# Altium PCB PCB1.PcbDoc
Units mil, origin at the board's own origin, x right, y up, seen from the top; angles counter-clockwise.
Board outline 3450 x 2970 mil, 2 copper layers (Top Layer, Bottom Layer); 124 components, 93 nets, 362 pads, 0 vias.
Unrouted connection lines stored in the file: 236.
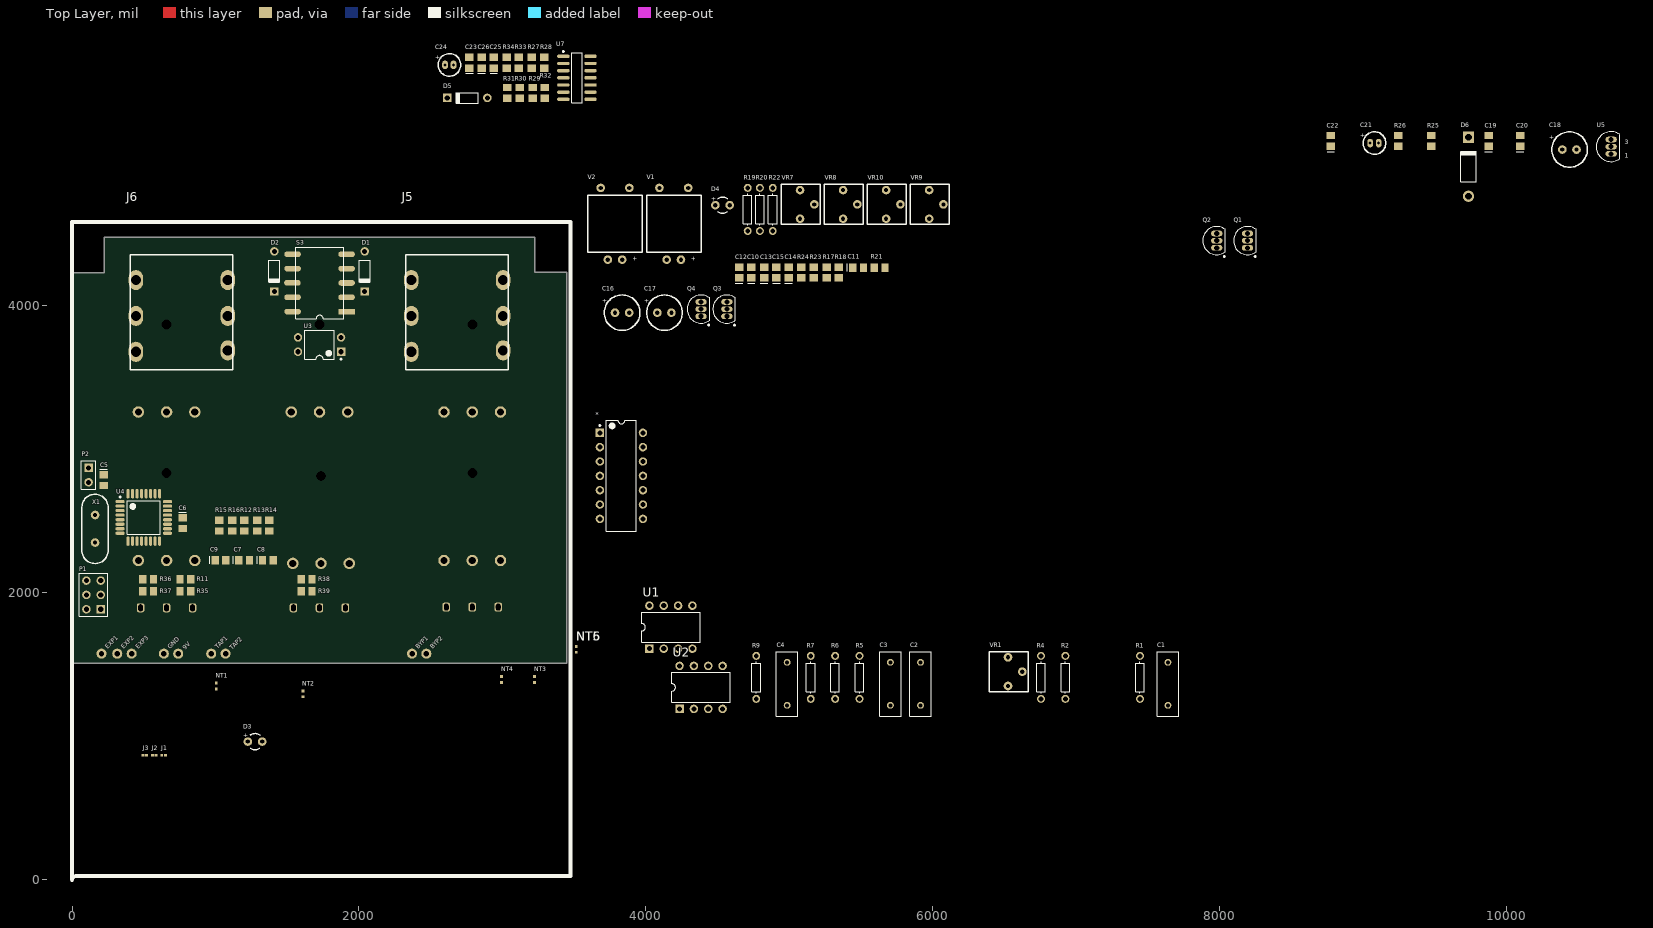
[diagram p0: Top Layer view]
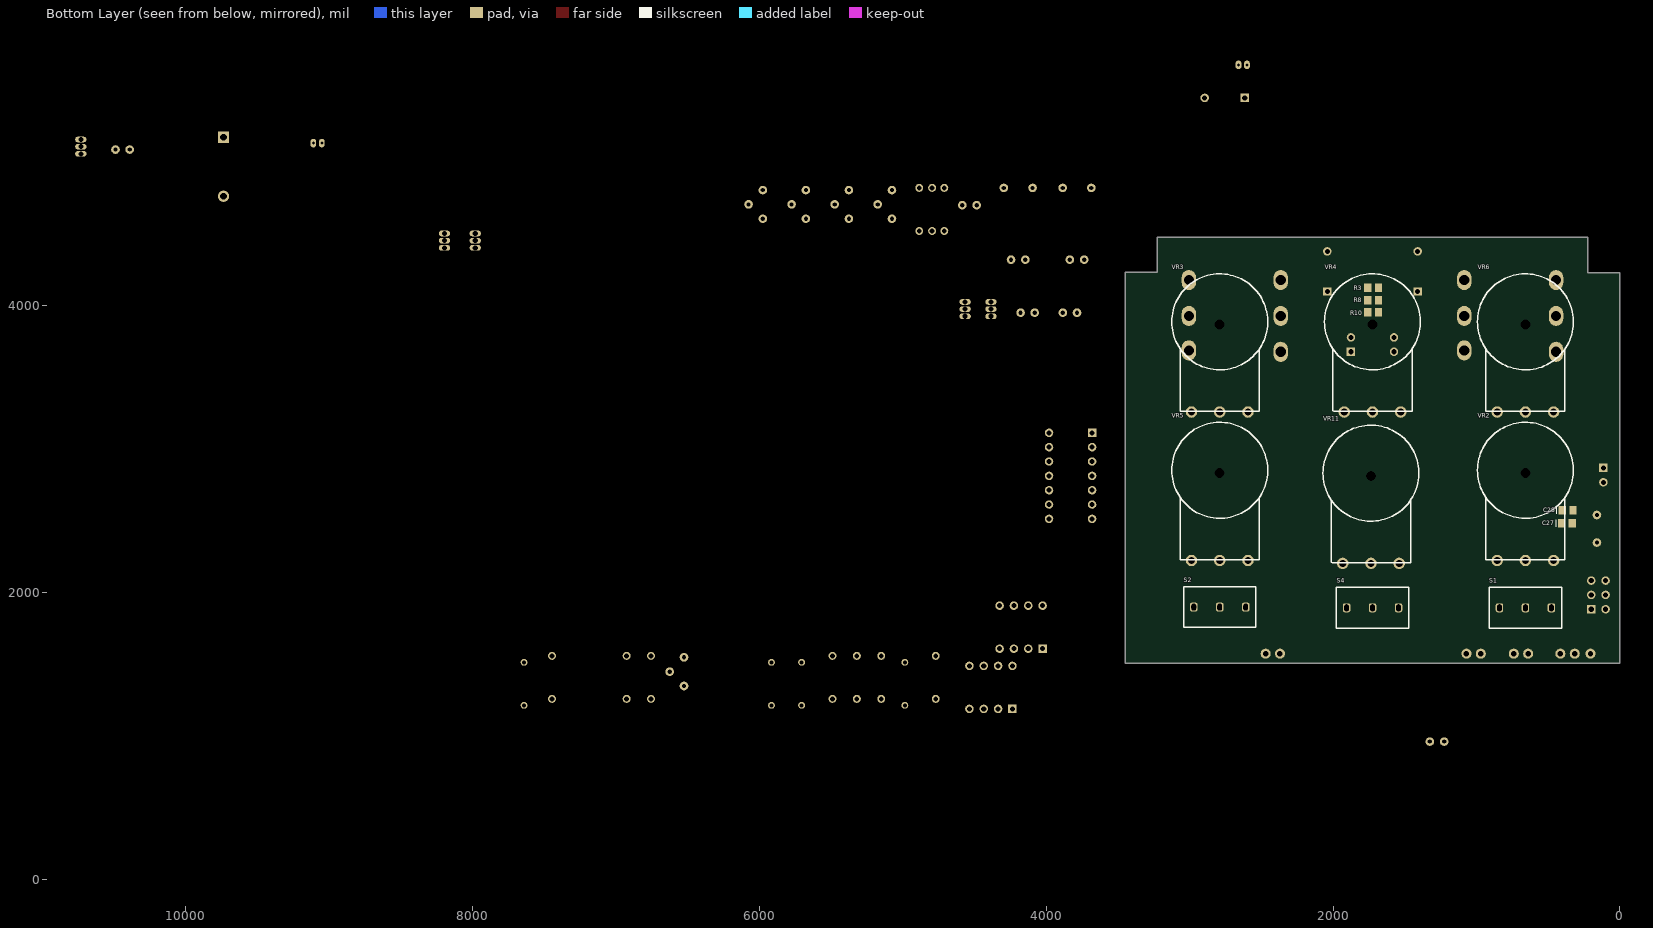
[diagram p1: Bottom Layer view, seen from below]

## Layer stack, top to bottom
Top Solder: solder mask 0.4, Solder Resist, Dk 3.5
Top Layer: signal copper 1.4
Dielectric 1: dielectric 12.6, FR-4, Dk 4.8
Bottom Layer: signal copper 1.4
Bottom Solder: solder mask 0.4, Solder Resist, Dk 3.5

## Board outline
3225,4235 3450,4235 3450,1510 0,1510 0,4230 225,4230 225,4480 3225,4480

## Design rules (kind name [scope] priority, off if disabled: settings)
Clearance [All] p1: gap=10 ignorepadtopadclearanceinfootprint=FALSE except(0: Arc-Hole Track-Hole SMDPad-Hole THPad-Hole Via-Hole Fill-Hole Poly-Hole Region-Hole Text-Hole)
PolygonConnect [All] p1: connectstyle=Relief reliefconductorwidth=10 reliefentries=4 polygonreliefangle="90 Angle" airgapwidth=10
RoomDefinition U_Envelope [InComponentClass('U_Envelope')] p1: confinementstyle=ConfineIn formatcopy=TRUE lockcomponents=FALSE outline 2475.24,5345 3715.24,5345 3715.24,5850 2475.24,5850
RoomDefinition U_Analog [InComponentClass('U_Analog')] p2: confinementstyle=ConfineIn formatcopy=TRUE lockcomponents=FALSE outline 3800,1130 7725,1130 7725,2080 3800,2080
RoomDefinition U_TAPLFO [InComponentClass('U_TAPLFO')] p3: confinementstyle=ConfineIn formatcopy=TRUE lockcomponents=FALSE outline 3580.32,3780 6170,3780 6170,4873.96 3580.32,4873.96
RoomDefinition U_Power [InComponentClass('U_Power')] p4: confinementstyle=ConfineIn formatcopy=TRUE lockcomponents=FALSE outline 6060,0 8060,0 8060,1000 6060,1000
RoomDefinition U_Bypass [InComponentClass('U_Bypass')] p5: confinementstyle=ConfineIn formatcopy=TRUE lockcomponents=FALSE outline 1355,3610 2095,3610 2095,4470 1355,4470
RoutingVias [All] p1: holewidth=28 width=50 viastyle="Through Hole" minholewidth=28 minwidth=50 maxholewidth=28 maxwidth=50
SolderMaskExpansion [All] p1: expansion=4
Width [All] p1: maxlimit=10 minlimit=10 preferedwidth=10
30 further rules are at their usual default settings.

## Classes and differential pairs
component class U_Envelope: C23 C24 C25 C26 D5 R27 R28 R29 R30 R31 R32 R33 R34 U7 VR11
component class U_TAPLFO: * C10 C11 C12 C13 C14 C15 C16 C17 D4 Q3 Q4 R17 R18 R19 R20 R21 R22 R23 R24 V1 V2 VR7 VR8 VR9 VR10
component class U_Power: C18 C19 C20 C21 C22 D6 R25 R26 U5
component class U_MCU: C5 C6 C7 C8 C9 C27 C28 D3 J1 J2 J3 P1 P2 R12 R13 R14 R15 R16 U4 X1
component class U_CONTROLS: 9V BYP1 BYP2 EXP1 EXP2 EXP3 GND J5 J6 NT1 NT2 NT3 NT4 NT5 NT6 R11 R35 R36 R37 R38 R39 S1 S4 TAP1 TAP2 VR2 VR4 VR5 VR6 VR?
component class U_Bypass: D1 D2 Q1 Q2 R3 R8 R10 S3 U3
component class U_Analog: C1 C2 C3 C4 R1 R2 R4 R5 R6 R7 R9 S2 U1 U2 VR1 VR3

## Components (designator, comment, footprint, x,y, rotation, side; value= is the part's Value field where it differs from the comment)
9V "Wire Pad" "Wire Pad" 740,1575 r0 top
* "TAPLFO 3C" DIP-14 3830,2815 r0 top
BYP1 "Wire Pad" "Wire Pad" 2370,1575 r0 top
BYP2 "Wire Pad" "Wire Pad" 2470,1575 r0 top
C1 "Cap" RAD-0.3 7640,1365 r90 top value=10n
C2 "Cap" RAD-0.3 5915,1365 r90 top value=100n
C3 "Cap" RAD-0.3 5705,1365 r90 top value=100n
C4 "Cap" RAD-0.3 4985,1365 r90 top value=4.7n
C5 "C0805" 0805 220,2785 r270 top value=1uF
C6 "C0805" 0805 770,2485 r270 top value=100n
C7 "C0805" 0805 1200,2227.4 r0 top value=100n
C8 "C0805" 0805 1365,2227.4 r0 top value=100n
C9 "C0805" 0805 1035,2227.4 r0 top value=100n
C10 "C0805" 0805 4735,4232.4 r90 top value=100n
C11 "C0805" 0805 5480,4267.4 r0 top value=100n
C12 "C0805" 0805 4650,4232.4 r90 top value=100n
C13 "C0805" 0805 4825,4232.4 r90 top value=100n
C14 "C0805" 0805 4995,4232.4 r90 top value=100n
C15 "C0805" 0805 4910,4232.4 r90 top value=100n
C16 "CAP ELEC 100uF" "100uF CAP 2.5mm" 3785,3952.4 r0 top value=100uF
C17 "CAP ELEC 100uF" "100uF CAP 2.5mm" 4080,3952.4 r0 top value=100uF
C18 "CAP ELEC 100uF" "100uF CAP 2.5mm" 10390,5090 r0 top value=100uF
C19 "C0805" 0805 9875,5150 r90 top value=330n
C20 "C0805" 0805 10095,5150 r90 top value=100n
C21 "CAP ELEC 10uF" "CAP 10uF" 9050,5135 r0 top value=10uF
C22 "C0805" 0805 8775,5150 r90 top value=100n
C23 "C0805" 0805 2770.24,5695 r90 top value=100n
C24 "CAP ELEC 10uF" "CAP 10uF" 2600.24,5680 r0 top value=10uF
C25 "C0805" 0805 2940.24,5695 r90 top value=470n
C26 "C0805" 0805 2855.24,5695 r90 top value=470n
C27 "C0805" 0805 370,2485 r180 bottom value=18p
C28 "C0805" 0805 365,2575 r180 bottom value=18p
D1 "Diode 1N4148" DO-35 2040,4240 r270 top
D2 "Diode 1N4148" DO-35 1410,4240 r270 top
D3 "LED5MM" LED5MM 1275,962.4 r0 top
D4 "LED5MM" LED5MM 4535,4702.4 r0 top
D5 "1n914" DO-35 2755.24,5450 r180 top
D6 "Diode 1N4001" DO-41 9735,4970 r90 top
EXP1 "Wire Pad" "Wire Pad" 205,1575 r90 top
EXP2 "Wire Pad" "Wire Pad" 315,1575 r90 top
EXP3 "Wire Pad" "Wire Pad" 415,1575 r90 top
GND "Wire Pad" "Wire Pad" 640,1575 r0 top
J1 "Jumper" Jumper 635,867.4 r0 top
J2 "Jumper" Jumper 570,867.4 r0 top
J3 "Jumper" Jumper 505,867.4 r0 top
J5 "Stereo Jack" CliffJack 2365,4355 r0 top locked
J6 "Stereo Jack" CliffJack 445,4355 r0 top locked
NT1 "Net Tie" "Net Tie" 1005,1350 r90 top net-tie
NT2 "Net Tie" "Net Tie" 1610,1295 r90 top net-tie
NT3 "Net Tie" "Net Tie" 3225,1395 r90 top net-tie
NT4 "Net Tie" "Net Tie" 2995,1395 r90 top net-tie
NT5 "Net Tie" "Net Tie" 3515,1605 r90 top net-tie
NT6 "Net Tie" "Net Tie" 3515,1605 r90 top net-tie
P1 "Header 3X2" HDR2X3 200,1885 r90 top
P2 "Header 2" HDR1X2 115,2870 r270 top
Q1 "2N3904" TO-92A 8195,4454.76 r0 top
Q2 "2N3904" TO-92A 7980,4454.76 r0 top
Q3 "2N3906" TO-92A 4565,3977.4 r0 top
Q4 "2N3904" TO-92A 4385,3977.4 r0 top
R1 "Res1" AXIAL-0.3 7445,1410 r90 top value=10k
R2 "Res1" AXIAL-0.3 6925,1410 r90 top value=10k
R3 "1k" ERA-0805 1720,4125 r180 bottom
R4 "Res1" AXIAL-0.3 6755,1410 r90 top value=2.2k
R5 "Res1" AXIAL-0.3 5490,1410 r90 top value=10k
R6 "Res1" AXIAL-0.3 5320,1410 r90 top value=1M
R7 "Res1" AXIAL-0.3 5150,1410 r90 top value=1M
R8 "1k" ERA-0805 1720,4040 r180 bottom
R9 "Res1" AXIAL-0.3 4770,1410 r90 top value=10k
R10 "1k" ERA-0805 1720,3955 r180 bottom
R11 "22k" ERA-0805 790,2095 r180 top
R12 "3.3k" ERA-0805 1200,2467.4 r90 top
R13 "47k" ERA-0805 1290,2467.4 r90 top
R14 "47k" ERA-0805 1375,2467.4 r90 top
R15 "47k" ERA-0805 1025,2467.4 r90 top
R16 "10k" ERA-0805 1115,2467.4 r90 top
R17 "47k" ERA-0805 5260,4232.4 r90 top
R18 "47k" ERA-0805 5345,4232.4 r90 top
R19 "Res1" AXIAL-0.3 4710,4672.4 r90 top value=1K
R20 "Res1" AXIAL-0.3 4795,4672.4 r90 top value=220
R21 "47k" ERA-0805 5630,4267.4 r0 top
R22 "Res1" AXIAL-0.3 4885,4672.4 r90 top value=50
R23 "47k" ERA-0805 5170,4232.4 r90 top
R24 "47k" ERA-0805 5085,4232.4 r90 top
R25 "10k" ERA-0805 9475,5150 r90 top
R26 "10k" ERA-0805 9245,5150 r90 top
R27 "4.7k" ERA-0805 3205.24,5695 r90 top
R28 "22k" ERA-0805 3290.24,5695 r90 top
R29 "100k" ERA-0805 3210.24,5485 r90 top
R30 "33k" ERA-0805 3120.24,5485 r90 top
R31 "47k" ERA-0805 3035.24,5485 r90 top
R32 "1k" ERA-0805 3295.24,5485 r90 top
R33 "4.7k" ERA-0805 3115.24,5695 r90 top
R34 "4.7k" ERA-0805 3030.24,5695 r90 top
R35 "22k" ERA-0805 790,2010 r180 top
R36 "15k" ERA-0805 530,2095 r0 top
R37 "22k" ERA-0805 530,2010 r0 top
R38 "22k" ERA-0805 1635,2095 r180 top
R39 "22k" ERA-0805 1635,2010 r180 top
S1 "SPDT Toggle" "SPDT Toggle" 839.88,1895 r180 bottom
S2 "SPDT Toggle" "SPDT Toggle" 2971.1,1900 r180 bottom
S3 "Relay DPDT Dual Coil" "EB2 Relay" 1913.98,3960 r180 top
S4 "SPDT Toggle" "SPDT Toggle" 1905.49,1895 r180 bottom
TAP1 "Wire Pad" "Wire Pad" 970,1575 r0 top
TAP2 "Wire Pad" "Wire Pad" 1070,1575 r0 top
U1 "LM833N" 626-05 4175,1760 r0 top
U2 "LM833N" 626-05 4385,1340 r0 top
U3 "Optoisolator1" DIP-4 1725,3730 r180 top
U4 "ATmega328P-AU" 32A_N 500,2525 r0 top
U5 "MC78L05ACPRA" 29-04 10730,5110 r0 top
U7 "MC33204DR2G" 751A-03_N 3519.72,5590 r0 top
V1 "Vactrol" VACTROL 4195,4572.4 r90 top
V2 "Vactrol" VACTROL 3785,4572.4 r90 top
VR1 "Gain Trim" "Trimpot - Bourns" 6575,1450 r0 top value=25k
VR2 "Pot-16mm" Pot-16mm 658.78,2224.76 r180 bottom locked value=B10k
VR3 "Pot-16mm" Pot-16mm 2790,3259.76 r180 bottom locked value=A1M
VR4 "Pot-16mm" Pot-16mm 1725,3259.76 r180 bottom locked value=B10k
VR5 "Pot-16mm" Pot-16mm 2790,2224.76 r180 bottom locked value=B10k
VR6 "Pot-16mm" Pot-16mm 658.78,3259.76 r180 bottom locked value=B10k
VR7 "Trim" "Trimpot - Bourns" 5125,4707.4 r0 top value=10k
VR8 "Trim" "Trimpot - Bourns" 5425,4707.4 r0 top value=1k
VR9 "Trim" "Trimpot - Bourns" 6025,4707.4 r0 top value=1k
VR10 "Trim" "Trimpot - Bourns" 5725,4707.4 r0 top value=10k
VR11 "Pot-16mm" Pot-16mm 1735.51,2204.76 r180 bottom locked value=B100k
X1 "16M" "XTAL PTH" 160,2350 r90 top

## Footprints (in the part's own frame and the unit in brackets; to place one, negate y for a bottom-side part, rotate by r counter-clockwise, add the part's x,y. Pads: shape width x height; smd on the part's side, far side on the other; paste and mask are expansions set on the pad)
29-04 [mm] "TO, Flat Index; 3 In-Line, Axial Leads; Body Dia. 4.8mm; Leads 0.48 x 0.51 mm (max)"
  oval 2x1 hole 0.9: 1(0,-1.27) 2(0,0) 3(0,1.27)
  silkscreen extent -2.65,-2.65 1.55,2.65
32A_N [mm] "Thin QFP, 32-Leads, Body 7x7mm, Pitch 0.8mm, IPC Medium Density"
  oval 1.65x0.55 smd: 1(-4.2,2.8) 2(-4.2,2) 3(-4.2,1.2) 4(-4.2,0.4) 5(-4.2,-0.4) 6(-4.2,-1.2) 7(-4.2,-2) 8(-4.2,-2.8) 17(4.2,-2.8) 18(4.2,-2) 19(4.2,-1.2) 20(4.2,-0.4) 21(4.2,0.4) 22(4.2,1.2) 23(4.2,2) 24(4.2,2.8)
  oval 0.55x1.65 smd: 9(-2.8,-4.2) 10(-2,-4.2) 11(-1.2,-4.2) 12(-0.4,-4.2) 13(0.4,-4.2) 14(1.2,-4.2) 15(2,-4.2) 16(2.8,-4.2) 25(2.8,4.2) 26(2,4.2) 27(1.2,4.2) 28(0.4,4.2) 29(-0.4,4.2) 30(-1.2,4.2) 31(-2,4.2) 32(-2.8,4.2)
  silkscreen extent -4.32,-2.95 2.95,3.75, body extent -3.5,-3.5 3.5,3.5, height 1.2
"100uF CAP 2.5mm" [mil] "100uF Nichicon electrolytic, 2.5mm lead spacing"
  round 60 hole 30: 1(0,0) 2(98.43,0)
  silkscreen extent -74,-124 174,124
626-05 [mm] "DIP; 8 Leads; Row Spacing 7.62 mm; Pitch 2.54 mm"
  rect 1.5x1.5 hole 0.9: 1(-3.81,-3.81)
  round 1.5 hole 0.9: 2(-1.27,-3.81) 3(1.27,-3.81) 4(3.81,-3.81) 5(3.81,3.81) 6(1.27,3.81) 7(-1.27,3.81) 8(-3.81,3.81)
  silkscreen extent -5.15,-2.65 5.15,2.65
751A-03_N [mm] "SOIC, 14-Leads, Body 8.7x3.9mm, Pitch 1.27mm, IPC Medium Density"
  oval 2.2x0.6 smd: 1(-2.4,3.81) 2(-2.4,2.54) 3(-2.4,1.27) 4(-2.4,0) 5(-2.4,-1.27) 6(-2.4,-2.54) 7(-2.4,-3.81) 8(2.4,-3.81) 9(2.4,-2.54) 10(2.4,-1.27) 11(2.4,0) 12(2.4,1.27) 13(2.4,2.54) 14(2.4,3.81)
  silkscreen extent -2.52,-4.4 0.9,4.78, body extent -2,-4.38 2,4.38, height 1.75
0805 [mm] "Chip Capacitor; Body 2.0 x 1.2 mm (LxW typ)"
  rect 1.3x1.5 smd: 1(-0.95,0) 2(0.95,0)
  silkscreen extent -1.9,-0.65 -1.9,0.65
AXIAL-0.3 [mm] "Axial Device, Thru-Hole; 2 Leads; 0.3 in Pin Spacing"
  round 1.4 hole 0.85: 1(-3.81,0) 2(3.81,0)
  silkscreen extent -2.77,-0.76 2.77,0.76
"CAP 10uF" [mil]
  oval 40x60 hole 21.65: 1(0,0) 2(59.06,0)
  silkscreen extent -49,-79 109,79
CliffJack [mil]
  oval 100x140 hole 70.87: R(640,-425) RS(0,-425) S(640,-175) SS(0,-175) T(640,-665) TS(0,-675)
  silkscreen extent -40,-800 675,0, body extent -77,-1003 710,343, height 1850
DIP-4 [mm] "DIP; 4 Leads; Row Spacing 7.62 mm; Pitch 2.54 mm"
  rect 1.5x1.5 hole 0.9: 1(-3.81,1.27)
  round 1.5 hole 0.9: 2(-3.81,-1.27) 3(3.81,-1.27) 4(3.81,1.27)
  silkscreen extent -3.94,-2.55 2.65,2.69, body extent -3.15,-2.5 3.15,2.5, height 5.6
DIP-14 [mm]
  rect 1.5x1.5 hole 0.9: 1(-3.81,7.62)
  round 1.5 hole 0.9: 2(-3.81,5.08) 3(-3.81,2.54) 4(-3.81,0) 5(-3.81,-2.54) 6(-3.81,-5.08) 7(-3.81,-7.62) 8(3.81,-7.62) 9(3.81,-5.08) 10(3.81,-2.54) 11(3.81,0) 12(3.81,2.54) 13(3.81,5.08) 14(3.81,7.62)
  silkscreen extent -3.93,-9.85 2.65,9.85, body extent -3.55,-9.85 3.55,9.85, height 5.34
DO-35 [mm] "Diode, Axial; Body 3.8 x 1.9 mm (LxDia. max), Lead Dia. 0.53 mm (max)"
  round 1.5 hole 0.9: 1(-3.55,0)
  rect 1.5x1.5 hole 0.9: 2(3.55,0)
  silkscreen extent -1.95,-0.95 2.05,0.95
DO-41 [mm] "Diode, Axial; Body 5.2 x 2.7 mm (LxDia. max), Lead Dia. 0.86 mm (max)"
  round 2 hole 1.2: 1(-5.23,0)
  rect 2x2 hole 1.2: 2(5.23,0)
  silkscreen extent -2.65,-1.4 2.75,1.4
"EB2 Relay" [mm]
  rect 2.94x1 smd: 1(0,0)
  oval 2.94x1 smd: 2(0,-2.54) 3(0,-5.08) 4(0,-7.62) 5(0,-10.16) 6(9.56,-10.16) 7(9.56,-7.62) 8(9.6,-5.1) 9(9.56,-2.54) 10(9.56,0)
  silkscreen extent 0.5,-11.43 9,1.27, body extent 0.5,-11.4 9,1.2, height 7.5
ERA-0805 [mm] "Chip Resistor; Body 2 x 1.3 mm (LxW typ)"
  rect 1.3x1.5 smd: 1(-0.95,0) 2(0.95,0)
HDR1X2 [mm] "Connector; Header; 2 Position"
  rect 1.5x1.5 hole 0.9: 1(0,0)
  round 1.5 hole 0.9: 2(2.54,0)
  silkscreen extent -1.27,-1.27 3.81,1.27
HDR2X3 [mm] "Connector; Header; 3x2 Position"
  rect 1.5x1.5 hole 0.9: 1(0,0)
  round 1.5 hole 0.9: 2(0,2.54) 3(2.54,0) 4(2.54,2.54) 5(5.08,0) 6(5.08,2.54)
  silkscreen extent -1.27,-1.27 6.35,3.81
Jumper [mil]
  rect 20x20 smd paste+0: 1(-10,0)
  rect 20x20 smd: 2(15,0)
LED5MM [mil]
  round 60 hole 30: 0(-50,0) 1(50,0)
  silkscreen extent -34,-56 35,57
"Net Tie" [mil]
  rect 20x20 smd mask+4: 0(-20,0) 1(20,0)
Pot-16mm [mil]
  round 80 hole 50: 1(196.85,0) 2(0,0) 2(0,0) 3(-196.85,0)
  round 0 hole 70: 6(0,610.24)
  silkscreen extent -335,4 334,964, body extent -335,-4 335,945, height 900
RAD-0.3 [mm] "Radial Cap, Thru-Hole; 2 Leads; 0.3 in Pin Spacing"
  round 1.2 hole 0.7: 1(-3.81,0) 2(3.81,0)
  silkscreen extent -5.71,-1.91 5.71,1.91
"SPDT Toggle" [mil]
  rrect50% 52x62 hole 31.5 slot 47.24 at 90 deg: 1(362.2,0) 2(181.1,0) 3(0,0)
  silkscreen extent -71,-142 433,142, body extent -73,-138 427,146, height 992
TO-92A [mm] "TO, Flat Index; 3 In-Line, Axial Leads; Body Dia. 4.5mm; Leads 0.51 x 0.48 mm (max)"
  oval 2x1 hole 0.9: 1(0,-1.27) 2(0,0) 3(0,1.27)
  silkscreen extent -2.48,-2.95 1.5,2.48, body extent -2.48,-2.5 1.5,2.5, height 6.86
"Trimpot - Bourns" [mil]
  round 60 hole 30: 1(-50,-100) 2(50,0) 3(-50,100)
  silkscreen extent -180,-140 90,140
VACTROL [mil]
  round 60 hole 30: 0(-250,-50) 1(-250,50) 2(250,100) 3(250,-100)
  silkscreen extent -200,-190 200,190
"Wire Pad" [mil]
  round 70 hole 38: 1(0,0)
"XTAL PTH" [mil]
  round 60 hole 30: 1(0,0) 2(192.13,0)
  silkscreen extent -147,-92 337,92

## Part data
C1 C2 C3 C4: "Capacitor", LatestRevisionDate=17-Jul-2002, LatestRevisionNote="Re-released for DXP Platform.", PackageDescription="Radial Cap, Thru-Hole; 2 Leads; 0.3 in Pin Spacing", PackageReference=RAD-0.3, Published=8-Jun-2000, Publisher="Altium Limited"
C5 C6 C7 C8 C9 C10 C11 C12 C13 C14 C15 C19 C20 C22 C23 C25 C26 C27 C28: "Ceramic Chip Capacitor - Standard", PackageDocument=Mar-2001, Code_IPC=2012[0805], Code_JEITA=0805, ComponentLink1Description="Manufacturer Link", ComponentLink1URL=http://www.kemet.com/, ComponentLink2Description=Datasheet, ComponentLink2URL=http://www.kemet.com/kemet/web/homepage/kechome.nsf/vapubfilesname/F3102TA.pdf/$file/F3102TA.pdf, DatasheetDocument=Mar-2001, LatestRevisionDate=19-Mar-2004, LatestRevisionNote="Silkscreen size reduced.", Note="Footprint corresponds to dimensions for bulk cassette packaging. This case size has tightened tolerances.", PackageReference=0805, Published=17-Jul-2002, Publisher="Altium Limited"
C16 C17 C18: Manufacturer=Nichicon, MPN=UFW1E101MED1TD, Voltage Rating=25V, Height=11mm
C21 C24: Manufacturer=Nichicon, MPN=USR1E100MDD1TE, Voltage Rating=25V, Height=11mm
D1 D2: "High Conductance Fast Diode", Code_JEDEC=DO-204-AH, ComponentLink1Description="Manufacturer Link", ComponentLink1URL=http://www.fairchildsemi.com/, ComponentLink2Description=Datasheet, ComponentLink2URL=http://www.fairchildsemi.com/ds/1N%2F1N4148.pdf, DatasheetVersion=1997, LatestRevisionDate=17-Jul-2002, LatestRevisionNote="Re-released for DXP Platform.", PackageDescription="Diode, Axial; Body 3.8 x 1.9 mm (LxDia. max), Lead Dia. 0.53 mm (max)", PackageReference=DO-35, Published=8-Jun-2000, Publisher="Altium Limited"
D5: library part "Diode 1N4150", "High Conductance Ultra Fast Diode", Code_JEDEC=DO-204-AH, ComponentLink1Description="Manufacturer Link", ComponentLink1URL=http://www.fairchildsemi.com/, DatasheetVersion=1997, LatestRevisionDate=17-Jul-2002, LatestRevisionNote="Re-released for DXP Platform.", PackageDescription="Diode, Axial; Body 3.8 x 1.9 mm (LxDia. max), Lead Dia. 0.53 mm (max)", PackageReference=DO-35, Published=8-Jun-2000, Publisher="Altium Limited"
D6: "1 Amp General Purpose Rectifier", Code_JEDEC=DO-204-AL, ComponentLink1Description="Manufacturer Link", ComponentLink1URL=http://www.fairchildsemi.com/, ComponentLink2Description=Datasheet, ComponentLink2URL=http://www.fairchildsemi.com/ds/1N%2F1N4001.pdf, DatasheetVersion=1998, LatestRevisionDate=17-Jul-2002, LatestRevisionNote="Re-released for DXP Platform.", PackageDescription="Diode, Axial; Body 5.2 x 2.7 mm (LxDia. max), Lead Dia. 0.86 mm (max)", PackageReference=DO-41, PackageVersion=Aug-1999, Published=8-Jun-2000, Publisher="Altium Limited"
P1: "Header, 3-Pin, Dual row", LatestRevisionDate=17-Jul-2002, LatestRevisionNote="Re-released for DXP Platform.", Publisher="Altium Limited"
P2: "Header, 2-Pin", LatestRevisionDate=17-Jul-2002, LatestRevisionNote="Re-released for DXP Platform.", Publisher="Altium Limited"
Q1 Q2 Q4: "NPN General Purpose Amplifier", ComponentLink1Description="Manufacturer Link", ComponentLink1URL=http://www.fairchildsemi.com/, ComponentLink2Description=Datasheet, ComponentLink2URL=http://www.fairchildsemi.com/ds/2N%2F2N3904.pdf, DatasheetVersion=1997, LatestRevisionDate=15-Jan-2003, LatestRevisionNote="PCB Footprint 'BCY-W3/D4.7' replaced", PackageDescription="TO, Flat Index; 3 In-Line, Axial Leads; Body Dia. 4.5mm; Leads 0.51 x 0.48 mm (max)", PackageReference=TO-92A, PackageVersion=Sep-1998, Published=8-Jun-2000, Publisher="Altium Limited"
Q3: "PNP General Purpose Amplifier", ComponentLink1Description="Manufacturer Link", ComponentLink1URL=http://www.fairchildsemi.com/, ComponentLink2Description=Datasheet, ComponentLink2URL=http://www.fairchildsemi.com/ds/2N%2F2N3906.pdf, DatasheetVersion=1997, LatestRevisionDate=15-Jan-2003, LatestRevisionNote="PCB Footprint 'BCY-W3/D4.7' replaced", PackageDescription="TO, Flat Index; 3 In-Line, Axial Leads; Body Dia. 4.5mm; Leads 0.51 x 0.48 mm (max)", PackageReference=TO-92A, PackageVersion=Sep-1998, Published=8-Jun-2000, Publisher="Altium Limited"
R1 R2 R4 R5 R6 R7 R9 R19 R20 R22: "Resistor", LatestRevisionDate=17-Jul-2002, LatestRevisionNote="Re-released for DXP Platform.", PackageDescription="Axial Device, Thru-Hole; 2 Leads; 0.3 in Pin Spacing", PackageReference=AXIAL-0.3, Published=8-Jun-2000, Publisher="Altium Limited"
R3 R8 R10 R25 R26 R27 R28 R29 R30 R31 R32 R34: library part ERAS, "Metal Film Thermosensitive Chip Resistor, 0.56 Ohm to 10k Ohm Range, 5% Tolerance, 0805 Size, 0.1 W", PackageDocument=Mar-2003, Code_IPC="2012 [0805]", ComponentLink1Description="Manufacturer Link", ComponentLink1URL=http://www.panasonic.com/industrial/components/resistive_products.htm, ComponentLink2Description=Datasheet, ComponentLink2URL=http://www.panasonic.com/industrial/components/pdf/AOF0000CE1.pdf, LatestRevisionDate=19-Mar-2004, LatestRevisionNote="Silkscreen size reduced.", Note="If flow soldering, adjust pad width of PCB Footprint to 0.7 - 0.8 times the width of the resistor.", PackageReference=ERA-0805, Published=17-Dec-2003, Publisher="Altium Limited"
R11 R12 R13 R14 R15 R16 R17 R18 R21 R23 R24 R33 R35 R36 R37 R38 R39: library part ERAS, "Resistor 0805", PackageDocument=Mar-2003, Code_IPC="2012 [0805]", ComponentLink1Description="Manufacturer Link", ComponentLink1URL=http://www.panasonic.com/industrial/components/resistive_products.htm, ComponentLink2Description=Datasheet, ComponentLink2URL=http://www.panasonic.com/industrial/components/pdf/AOF0000CE1.pdf, LatestRevisionDate=19-Mar-2004, LatestRevisionNote="Silkscreen size reduced.", Note="If flow soldering, adjust pad width of PCB Footprint to 0.7 - 0.8 times the width of the resistor.", PackageReference=ERA-0805, Published=17-Dec-2003, Publisher="Altium Limited"
U1 U2: "Low-Noise, Audio Dual Operational Amplifier", ComponentLink1Description="Manufacturer Link", ComponentLink1URL=http://www.onsemi.com/, ComponentLink2Description=Datasheet, ComponentLink2URL=http://www.onsemi.com/pub/Collateral/LM833-D.PDF, DatasheetVersion="Jan-2002, Rev. 2", PackageDescription="DIP; 8 Leads; Row Spacing 7.62 mm; Pitch 2.54 mm", PackageReference=626-05, PackageVersion=1998, Published=28-Feb-2003, Publisher="Altium Limited"
U3: "4-Pin Phototransistor Optocoupler", DatasheetVersion=Nov-2003, LatestRevisionDate=04-Mar-2005, LatestRevisionNote="Sch pins 3 & 4 Swapped.", PackageReference=DIP-4, Published=24-Mar-1999, Publisher="Altium Limited"
U4: "8-bit AVR Microcontroller, 32KB Flash, 1KB EEPROM, 2KB SRAM, 32-pin TQFP, Industrial Grade (-40°C to 85°C)", Supplier Part Number 1=ATMEGA328P-AU-ND, Code_JEDEC=MS-026-ABA, ComponentLink1Description="Manufacturer Link", ComponentLink1URL=http://www.atmel.com/products/avr/default.asp?, ComponentLink2Description="ATmega48A/48PA/88A/88PA/168A/168PA/328/328P Datasheet", ComponentLink2URL=http://www.atmel.com/dyn/resources/prod_documents/8271.pdf, ComponentLink3Description="ATmega48A/48PA/88A/88PA/168A/168PA/328/328P Summary", ComponentLink3URL=http://www.atmel.com/dyn/resources/prod_documents/8271S.pdf, ComponentLink4Description="Atmel.com Home", ComponentLink4URL=http://www.atmel.com, DatasheetVersion="revA, Jan-2010", PackageDescription="32-Lead, 7x7x1.0 mm Body, 0.8mm Lead Pitch, Thin Profile Plastic Quad Flat Package (TQFP)", PackageReference=32A, PackageVersion="revB, Oct-2001", Published=1-Apr-2010, Publisher="Altium Limited", Supplier 1=Digi-Key, Supplier 2=Farnell, Supplier 3=Mouser, Supplier Part Number 2=1715486, Supplier Part Number 3=556-ATMEGA328P-AU
U5: "Three-Terminal Low Current Positive Voltage Regulator", ComponentLink1Description="Manufacturer Link", ComponentLink1URL=http://www.onsemi.com/site/products/taxonomy/0,4438,503,00.html, ComponentLink2Description=Datasheet, ComponentLink2URL=http://www.onsemi.com/pub/Collateral/MC78L00A-D.PDF, DatasheetVersion=Oct-1999, PackageDescription="TO, Flat Index; 3 In-Line, Axial Leads; Body Dia. 4.8mm; Leads 0.48 x 0.51 mm (max)", PackageReference=29-04, PackageVersion=1996, Published=15-Apr-2002, Publisher="Altium Limited"
U7: library part MC34074DR2, "Single-Supply 3 to 44 V Operational Amplifier", Code_IPC=SOIC127P600-14, Code_JEDEC=MS-012-AB, ComponentLink1Description="Manufacturer Link", ComponentLink1URL=http://www.onsemi.com/, ComponentLink2Description=Datasheet, ComponentLink2URL=http://www.onsemi.com/pub/Collateral/MC34071-D.PDF, DatasheetVersion="Jan-2002, Rev. 5", LatestRevisionDate=13-Apr-2006, LatestRevisionNote="IPC-7351 Footprint Added.", PackageDescription="14-Pin Small Outline Integrated Circuit 1.27 mm Pitch", PackageReference=751A-03, Published=28-Feb-2003, Publisher="Altium Limited"
VR1 VR7 VR8 VR9 VR10: library part "Trimpot - Bourns"
X1: library part "Crystal PTH", MPN=ECS-160-20-4X

## Nets (pads, with @x,y where several pads share a name; then routed paths per layer and width w, separated by ;. In a path a pad name is that pad's centre, name@x,y a point inside that pad or via, vN(x,y) a via of type N, cw(c..) or ccw(c..) an arc to the next point about the centre after c; other vN are vias at no path point)
5V: D1.2 D2.2 S3.1 S3.10
9V_IN: 9V.1 C18.1 C19.2 D6.2 R25.2 U5.3
+5: *.1 C5.2 C6.2 C10.2 C16.1 C17.1 C20.2 NT6.1 P1.2 Q3.1 R11.2 R12.2 R16.2 R35.2 R38.2 U4.4 U4.6 U4.18 U5.1 U7.4 VR2.3 VR4.3 VR5.3 VR6.3 VR8.2
+9V: U1.8 U2.8
AGND: C18.2 C21.2 C22.1 NT2.1 R6.1 R26.1 U1.4 U2.4 U3.3 VR3.1
BYP_GND: BYP2.1 NT4.0
BYP_LED: D3.1 U4.2
BYPASS: BYP1.1 U4.24
DGND: *.14 C5.1 C6.1 C7.1 C8.1 C9.1 C10.1 C11.1 C12.1 C13.1 C14.1 C15.1 C16.2 C17.2 C19.1 C20.1 C24.2 C25.1 C26.1 C27.1 C28.1 NT1.0 NT3.1 NT4.1 NT5.1 P1.6 Q1.1 Q2.1 Q4.1 R34.1 R36.1 R37.1 R39.1 U3.2 U4.3 U4.5 U4.21 U5.2 U7.11 U7.12 V1.1 VR2.1 VR4.1 VR5.1 VR6.1
ENV_MODE: S4.2 U4.32
EXP_5V: EXP3.1 NT6.0
EXP_GND: EXP1.1 NT5.0
EXP_SIG: EXP2.1
GND: D6.1 GND.1 J5.S J5.TS J6.S J6.TS NT1.1 NT2.0
INPUT: J5.T S3.3
MISO: P1.1 U4.16
MOSI: P1.4 U4.15
MUTE: R3.2 U4.12
Net*_5: *.5 R19.1
Net*_9: *.9 C11.2 R24.1
Net*_10: *.10 C12.2 R23.1
Net*_11: *.11 C13.2 R21.1
Net*_12: *.12 C14.2 R18.1
Net*_13: *.13 C15.2 R17.1
NetC1_1: C1.1 R1.1 U1.1 V1.3
NetC1_2: C1.2 R1.2 R2.1 U1.2
NetC2_1: C2.1 VR3.3
NetC2_2: C2.2 U1.7 VR1.1
NetC3_1: C3.1 C23.2 R6.2 S3.4
NetC3_2: C3.2 R7.2 U2.3
NetC4_1: C4.1 R9.2 S2.3
NetC4_2: C4.2 S2.2 U2.1 U2.2
NetC7_2: C7.2 J1.1 R15.2 R23.2
NetC8_2: C8.2 J2.1 R13.1 R14.2 R17.2 U4.1
NetC9_2: C9.2 J3.1 R13.2 R24.2
NetC23_1: C23.1 R32.2
NetC24_1: C24.1 D5.2 R33.1 U7.6
NetC25_2: C25.2 R31.2 VR11.2
NetC26_2: C26.2 R31.1 U4.25
NetC27_2: C27.2 U4.8 X1.1
NetC28_2: C28.2 U4.7 X1.2
NetD1_1: D1.1 Q2.3 S3.5
NetD2_1: D2.1 Q1.3 S3.6
NetD3_0: D3.0 R12.1
NetD4_0: D4.0 V2.1
NetD4_1: D4.1 Q4.3
NetD5_1: D5.1 U7.7
NetJ1_2: J1.2 U4.26 VR4.2
NetJ2_2: J2.2 U4.27 VR2.2
NetJ3_2: J3.2 U4.28 VR5.2
NetQ1_2: Q1.2 R8.1
NetQ2_2: Q2.2 R10.1
NetQ3_2: Q3.2 VR7.2
NetQ3_3: Q3.3 R20.2
NetQ4_2: Q4.2 VR10.2
NetR2_2: R2.2 S2.1
NetR3_1: R3.1 U3.1
NetR4_1: R4.1 VR1.2
NetR4_2: R4.2 U1.6 V1.2 V2.2
NetR5_1: R5.1 U2.7 V2.3
NetR5_2: R5.2 R9.1 U2.6
NetR11_1: R11.1 S1.3
NetR14_1: R14.1 U4.9
NetR15_1: R15.1 U4.10
NetR18_2: R18.2 R35.1 R36.2 S1.2
NetR19_2: R19.2 VR7.1 VR10.1
NetR20_1: R20.1 VR9.1
NetR21_2: R21.2 VR6.2
NetR22_1: R22.1 V2.0
NetR22_2: R22.2 VR8.1
NetR27_2: R27.2 R28.1 U7.2
NetR28_2: R28.2 R30.2 U7.1
NetR29_1: R29.1 U7.5 U7.8
NetR29_2: R29.2 R32.1 U7.9
NetR30_1: R30.1 VR11.1
NetR33_2: R33.2 R34.2 U7.3
NetR37_2: R37.2 S1.1
NetR38_1: R38.1 S4.3
NetR39_2: R39.2 S4.1
NetS3_2: S3.2 S3.9
NetS3_7: S3.7 VR3.2
NetU7_13: U7.13 U7.14
NetV1_0: V1.0 VR9.2
OUTPUT: J6.T S3.8 U3.4
R\E\S\E\T\: P1.5 R16.1 U4.29
RESET_COIL: R8.2 U4.14
RXD: P2.1 U4.30
SCK: P1.3 U4.17
SET_COIL: R10.2 U4.13
TAP_GND: NT3.0 TAP2.1
TAP_IN: *.4 TAP1.1 U4.23
TXD: P2.2 U4.31
Vref: C21.1 C22.2 R7.1 R25.1 R26.2 R27.1 U1.3 U1.5 U2.5 U7.10
pads on no net: *.2 *.3 *.6 *.7 *.8 J5.R J5.RS J5.SS J6.R J6.RS J6.SS U4.11 U4.19 U4.20 U4.22 VR1.3 VR2.6 VR3.6 VR4.6 VR5.6 VR6.6 VR7.3 VR8.3 VR9.3 VR10.3 VR11.3 VR11.6

## Silkscreen, mask and mechanical layers (free items; w line width, h text height)
Top Overlay:
  lines w10: 0,0 25,25
  lines w30: 0,0 0,4585 3475,4585 3475,25 25,25

## Text inside footprints (layer, text, board x,y; h text height)
C16: Top Overlay "+" at 3695,4022.4 h30
C17: Top Overlay "+" at 3990,4022.4 h30
C18: Top Overlay "+" at 10300,5160 h30
C21: Top Overlay "+" at 8980,5175 h30
C24: Top Overlay "+" at 2530.24,5720 h30
D3: Top Overlay "+" at 1195,992.4 h30
D4: Top Overlay "+" at 4455,4732.4 h30
U5: Top Overlay "1" at 10825.32,5032.09 h30; Top Overlay "3" at 10825.32,5128.39 h30
V1: Top Overlay "+" at 4345,4312.4 h30 r90
V2: Top Overlay "+" at 3935,4312.4 h30 r90